# Altium PCB Rackmount_DSP.PcbDoc (part 11 of 24)
Units mil, origin at the board's own origin, x right, y up, seen from the top; angles counter-clockwise.
Board outline 10629.92 x 8267.72 mil, 4 copper layers (Top Layer, Mid Layer 1, Mid Layer 2, Bottom Layer), stack 36.2 mil thick; 4500 components, 1565 nets, 9765 pads, 3289 vias.
Unrouted connection lines stored in the file: 1.
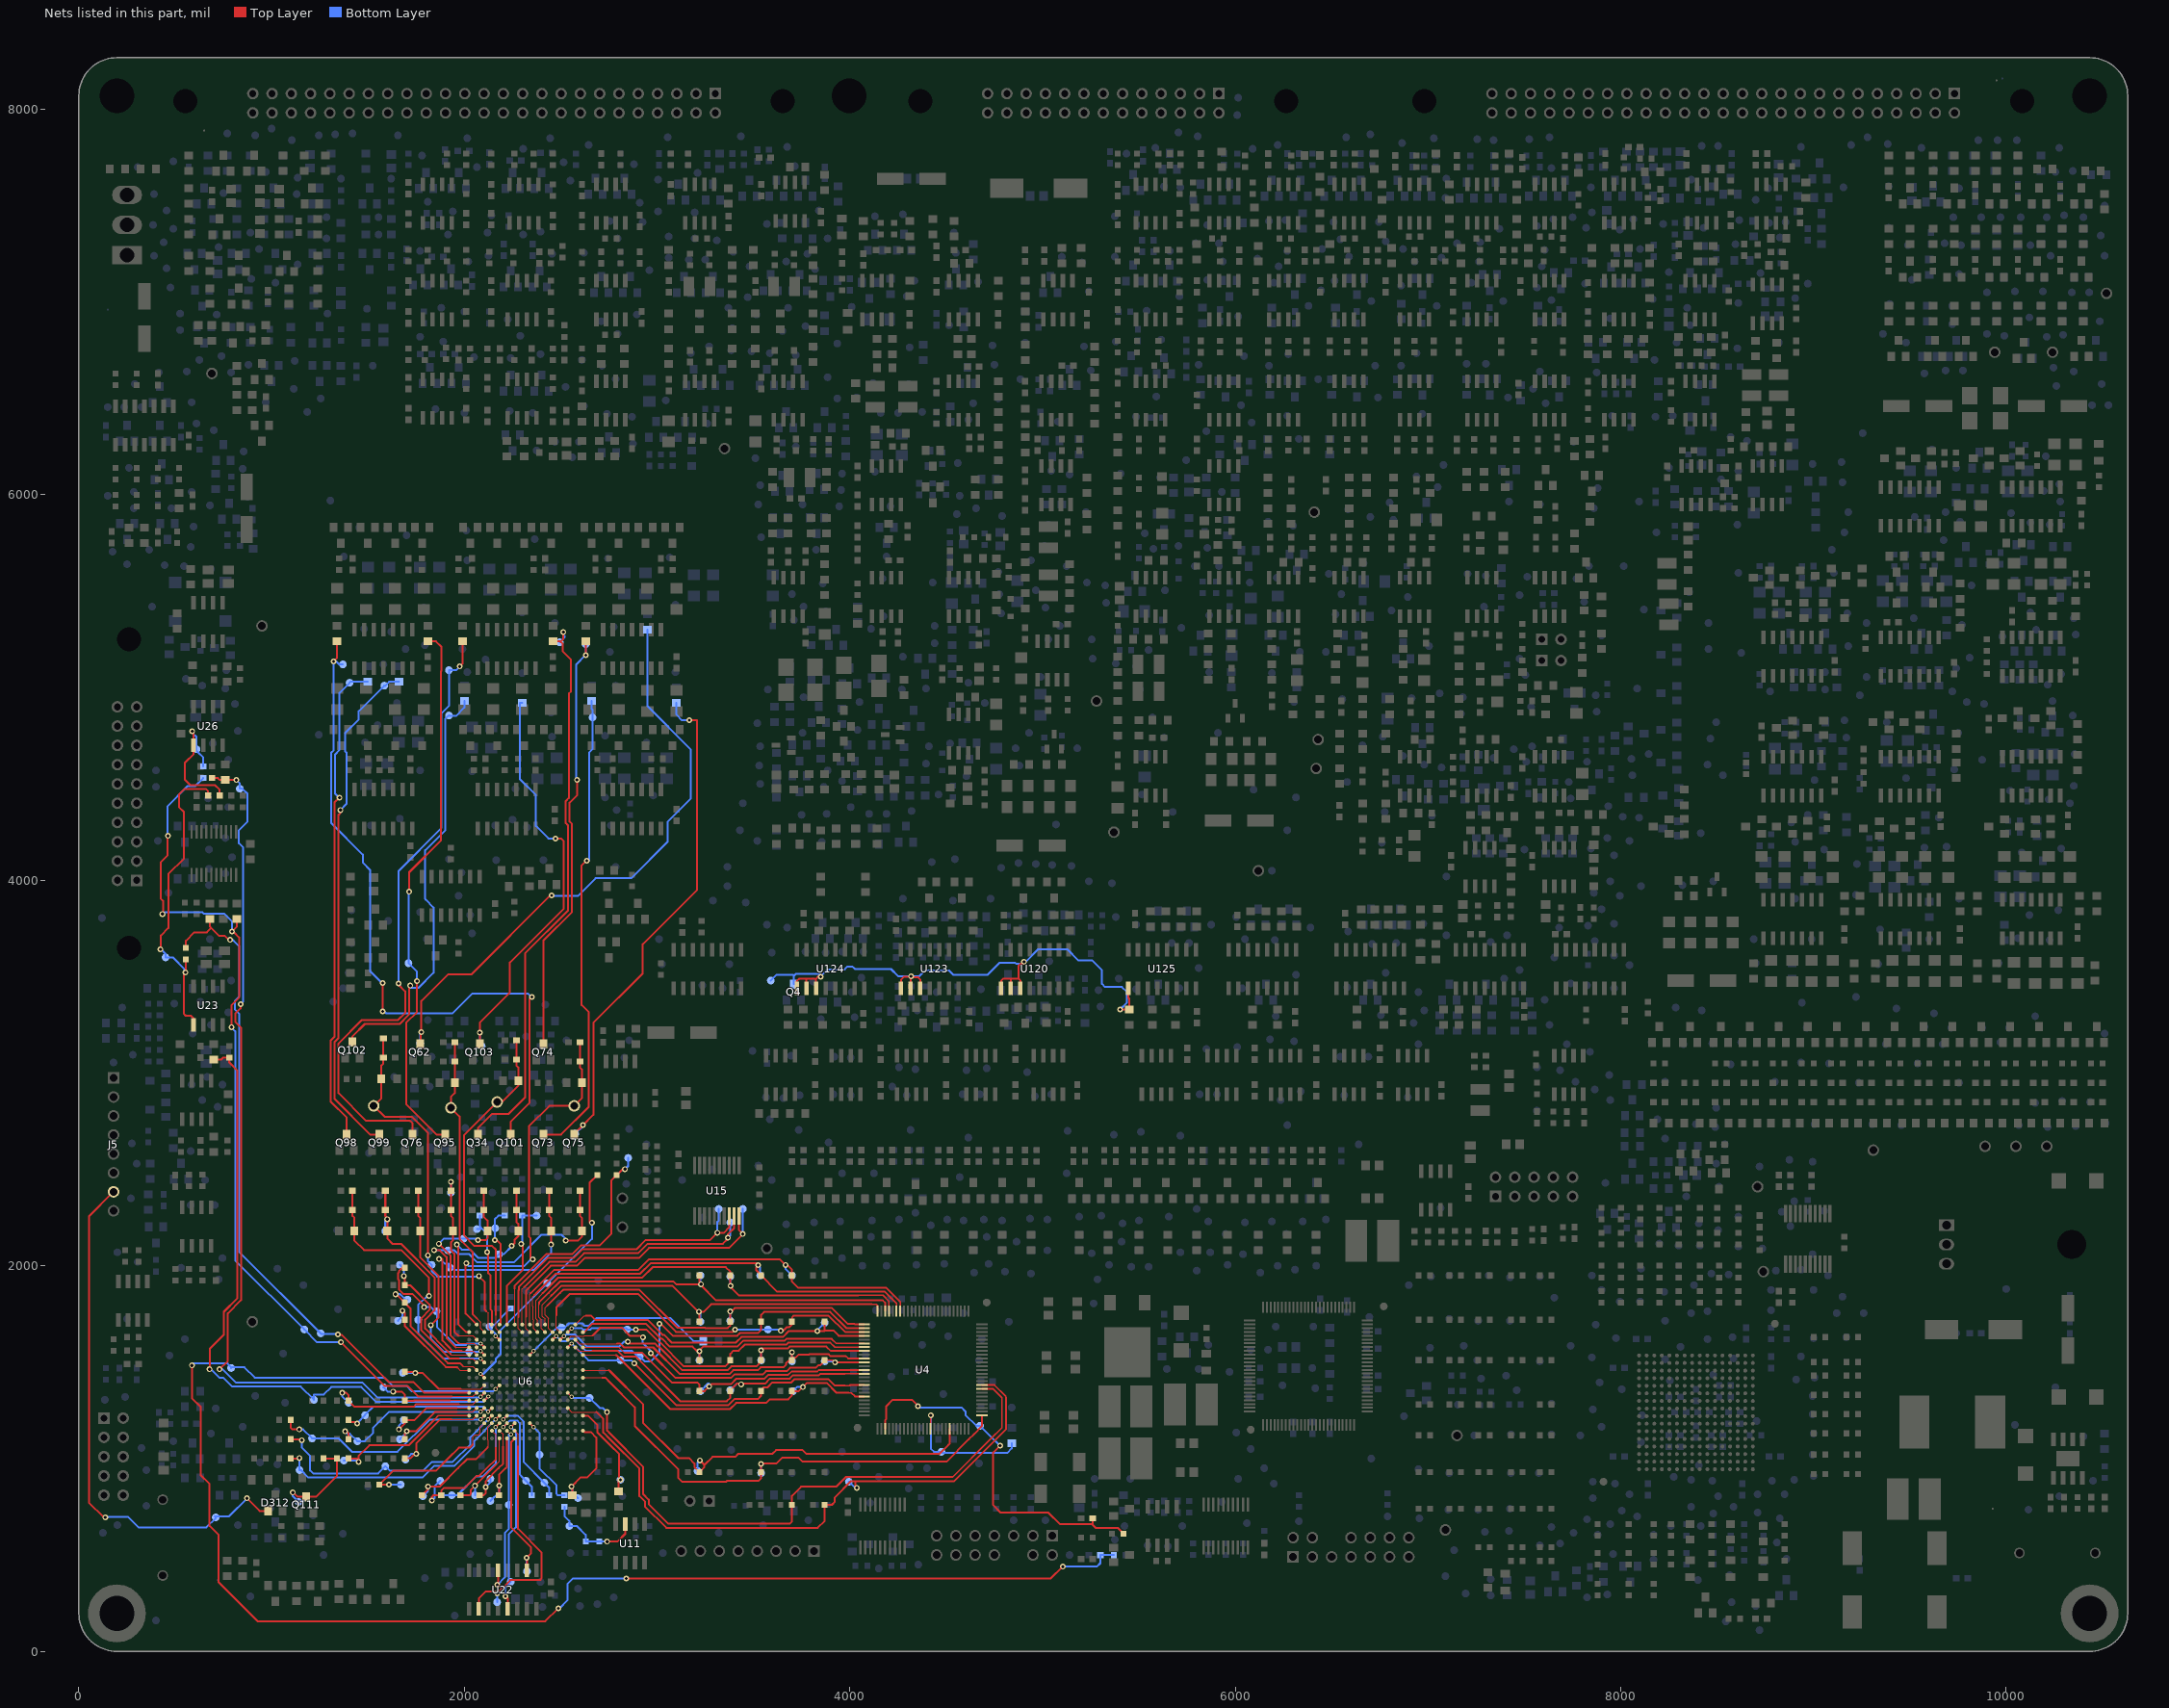
[diagram p13: the nets of this part, all layers, seen from the top]

## Via types
v1: diameter 30, hole 16, Top Layer to Bottom Layer, 3143 vias
v2: diameter 22, hole 12, Top Layer to Bottom Layer, 146 vias

## Nets (pads, with @x,y where several pads share a name; then routed paths per layer and width w, separated by ;. In a path a pad name is that pad's centre, name@x,y a point inside that pad or via, vN(x,y) a via of type N, cw(c..) or ccw(c..) an arc to the next point about the centre after c; other vN are vias at no path point) (continued)
INV_BOOT_EN: D312.1 J5.7 TP383.1 | length 2753.9
  Top Layer w10: v1(136.68,695.03) 136.68,696.48 128.01,696.48 52.18,772.3 52.18,2256.12 J5.7@180,2383.94 ; v1(872.31,793.94) 937.75,728.5 D312.1@982.5,728.5
  Bottom Layer w10: v1(136.68,695.03) 136.68,697.19 255.32,697.19 309.45,643.06 661.43,643.06 710,691.62 TP383.1@710,695 705,700 778.37,700 v1(872.31,793.94)
INV_BOOT_EN_I: Q111.3 R694.2 R1046.2 TP563.1 | length 505
  Top Layer w10: v1(1110.05,824) 1113.98,824 1136.48,801.5 Q111.3@1180,801.5 1230.39,801.5 1340,911.11 R1046.2@1340,1000 R694.2@1270,1000
  Bottom Layer w10: v1(1110.05,824) 1110.05,804.95 TP563.1@1140,775
INV_CAN1_RXD: R1312.1 R2722.1 TP382.1 U6.P11 | length 3403.3
  Top Layer w10: v1(677.95,1463.05) 679.64,1464.74 679.64,1569.94 752.06,1642.36 752.06,1761.39 821.55,1830.88 821.55,3013.72 780,3055.27 R2722.1@780,3080 747.5,3080 737.5,3070 R1312.1@700,3070 ; U6.P11@2103.46,1301.57 v2(2123.67,1321.78)
  Bottom Layer w10: v1(677.95,1463.05) 685.48,1463.05 728.98,1419.55 749.21,1419.55 794.77,1373.99 1151.01,1373.99 TP382.1@1220,1305 1220,1332.25 1270.8,1332.25 1309.63,1371.08 1465.18,1371.08 1541,1295.26 2097.15,1295.26 v2(2123.67,1321.78)
INV_CAN1_TXD: R1313.1 R3011.1 TP1783.1 U6.T10 | length 3533.7
  Top Layer w10: R3011.1@555,3650 555,3686.68 598.6,3730.28 664.45,3730.28 686.85,3752.68 ; R1313.1@680,3800 680,3759.52 686.85,3752.68 ; v1(784.31,3690.93) 777.32,3690.93 755.57,3712.68 726.84,3712.68 686.85,3752.68 ; v1(1344.62,1643.44) 1344.62,1642.81 1362.91,1642.81 1607.88,1397.84 1734.74,1397.84 1790.38,1342.2 1915,1342.2 1941.92,1342.2 1943.18,1340.94 U6.T10@2024.72,1340.94
  Bottom Layer w10: v1(784.31,3690.93) 784.31,3689.31 801.49,3689.31 831.77,3659.04 831.77,3396.39 808.63,3373.25 808.63,3331.26 831.84,3308.04 831.84,2072.27 TP1783.1@1255,1649.11 ; TP1783.1@1255,1650 TP1783.1@1255,1649.11 ; v1(1344.62,1643.44) 1342,1646.05 1258.06,1646.05 TP1783.1@1255,1649.11
INV_CAN1_TXD_5V: R2709.2 R3011.2 TP1875.1 U23.1 | length 1638
  Top Layer w10: v1(423.26,3642.44) 426.14,3642.44 426.14,3714.3 464.18,3752.35 464.18,4031.92 545.13,4112.87 545.13,4353.96 520.96,4378.13 520.96,4446.61 548.54,4474.19 657.96,4474.19 670,4462.15 R2709.2@670,4440 ; v1(553.47,3522.51) v1@555,3522.51 ; R3011.2@555,3590 v1@555,3522.51 ; U23.1@595,3250 595,3284.41 582.01,3297.4 554.87,3297.4 543.6,3308.67 543.6,3510.54 555.11,3522.05 555.11,3522.51 v1@555,3522.51
  Bottom Layer w10: v1(423.26,3642.44) 425.37,3642.44 450,3617.81 TP1875.1@450,3600 450,3599.56 488.14,3599.56 548.32,3539.38 548.32,3522.51 v1(553.47,3522.51)
INV_CAN2_RXD: R1307.1 R2723.1 TP1874.1 U6.P10 | length 4770.2
  Top Layer w10: R2723.1@690,4530 721,4530 731,4520 R1307.1@760,4520 v1(816.49,4520) ; v1(729.22,1463.05) 772.6,1506.43 772.6,1753.64 841.55,1822.59 841.55,3235.63 811.05,3266.13 811.05,3308.07 838.96,3335.98 v1(838.96,3357.05) ; v2(2083.78,1321.26) U6.P10@2103.46,1340.94
  Bottom Layer w10: v1(729.22,1463.05) 745.5,1463.05 813.55,1395 1470.84,1395 1548,1317.84 2083.78,1317.84 v2(2083.78,1321.26) ; v1(816.49,4520) 835,4501.49 TP1874.1@835,4475 848.98,4475 875.15,4448.83 875.15,4304.53 830.21,4259.59 830.21,4192.69 852.43,4170.47 852.43,3370.52 v1(838.96,3357.05)
INV_CAN2_TXD: R2714.1 R3013.1 TP1784.1 U6.R10 | length 4661.3
  Top Layer w6: 1933.9,1321.94 2045.09,1321.94 U6.R10@2064.09,1340.94
  Top Layer w10: v1(433.67,3825.26) 433.8,3825.26 436.47,3825.26 436.47,3893.62 423.88,3906.21 423.88,4093.54 459.02,4128.68 459.02,4232.71 462.72,4232.71 v1(462.72,4230.66) ; v1(791.4,3238.57) 790.91,3238.57 790.91,3351.5 831.26,3391.84 831.26,3703.73 805.54,3729.45 798.71,3729.45 v1(793.86,3734.3) 820,3760.44 R2714.1@820,3800 ; v1(1359.86,1603.44) 1585.46,1377.84 1704.11,1377.84 1759.74,1322.2 1915,1322.2 1933.64,1322.2 1933.9,1321.94
  Bottom Layer w10: v1(433.67,3825.26) 433.8,3825.26 433.8,3833.4 641.71,3833.4 648.56,3826.55 755.18,3826.55 793.86,3787.87 v1(793.86,3734.3) ; v1(462.72,4230.66) 462.72,4232.71 459.02,4232.71 459.02,4383.17 564.57,4488.71 603.71,4488.71 R3013.1@645,4530 ; v1(791.4,3238.57) 791.4,3237.01 811.59,3216.82 811.59,2027.42 TP1784.1@1169.5,1669.5 ; TP1784.1@1170,1670 TP1784.1@1169.5,1669.5 ; v1(1359.86,1603.44) 1235.57,1603.44 TP1784.1@1169.5,1669.5
INV_CAN2_TXD_5V: R2711.2 R3013.2 TP1886.1 U26.1 | length 710.2
  Top Layer w10: v1(588.32,4773.25) 595,4766.58 U26.1@595,4700 595,4655.75 550.47,4611.22 550.47,4521.01 577.28,4494.19 704.79,4494.19 730,4468.98 R2711.2@730,4440
  Bottom Layer w10: v1(588.32,4773.25) 588.32,4765.17 610,4743.49 TP1886.1@610,4680 610,4672.89 617.34,4665.55 645,4637.89 R3013.2@645,4590
INV_CPLD_CLK: R621.2 TP378.1 U6.H5 | length 1039.7
  Top Layer w10: U6.H5@2339.68,1537.8 v2(2359.37,1557.48)
  Bottom Layer w10: v2(2359.37,1557.48) 2481.89,1680 TP378.1@2505,1680 2521.27,1680 2542.86,1701.59 2611.56,1701.59 2624.19,1688.96 2645.73,1688.96 2686.25,1729.48 3068.39,1729.48 3187.88,1610 R621.2@3240,1610
INV_CPLD_RESET: C514.1 R1048.2 TP377.1 U6.M9 | length 7806.9
  Top Layer w6: v2(2161.93,1360.04) U6.M9@2182.2,1380.32
  Top Layer w10: v1(586.1,1483.26) 586.1,1313.77 632.25,1267.62 632.25,913.76 677.53,868.48 677.53,651.25 724.88,603.91 724.88,357.79 926.83,155.85 2419.21,155.85 2486.16,222.79 v1(2488.46,222.79) ; v1(2840.58,378.59) 5042.8,378.59 5103.74,439.52 v1(5105.72,439.52)
  Bottom Layer w10: v1(586.1,1483.26) 586.1,1485.69 593.46,1493.05 770.91,1493.05 TP377.1@790,1473.96 ; TP377.1@790,1470 TP377.1@790,1473.96 ; v2(2161.93,1360.04) 2150.28,1348.39 1728.27,1348.39 1698.82,1377.84 1626.75,1377.84 1584.59,1420 912.71,1420 858.75,1473.96 TP377.1@790,1473.96 ; v1(2488.46,222.79) 2492.86,222.79 2535.13,265.07 2535.13,349.15 2564.56,378.59 v1(2840.58,378.59) ; v1(5105.72,439.52) 5281.62,439.52 5300,457.9 C514.1@5300,500 R1048.2@5370,500
INV_CS: Q4.3 R1464.2 TP376.1 U120.9 U120.10 U120.11 U123.9 U123.10 U123.11 U124.9 U124.10 U124.11 U125.9 | length 3330.1
  Top Layer w10: U124.9@3725,3440 3725,3477.79 3736.96,3489.75 3775,3489.75 3775,3489.48 ; U124.10@3775,3440 3775,3489.48 ; U124.11@3825,3440 3825,3489.48 ; v1(3848.72,3499.92) 3835.44,3499.92 3825,3489.48 ; U123.9@4265,3440 4265,3484.15 4281.64,3500.78 v1@4315,3500.78 ; U123.10@4315,3440 v1@4315,3495.97 ; v1(4317.42,3502.7) 4317.42,3500.78 v1@4315,3500.78 ; U123.11@4365,3440 4365,3485.79 4354.82,3495.97 v1@4315,3495.97 ; U120.9@4785,3440 4785,3478.71 4796.29,3490 4835,3490 ; U120.10@4835,3440 4835,3490 ; U120.11@4885,3440 4885,3480.3 4875.3,3490 ; v1(4903.74,3576.79) 4899.51,3576.79 4899.51,3567.37 4887,3567.37 4875.29,3555.66 4875.29,3490 ; v1(5402.38,3330) R1464.2@5450,3330 5450,3385 5445,3390 U125.9@5445,3440 ; 3775,3489.48 3825,3489.48 ; v1@4315,3495.97 v1@4315,3500.78 ; 4835,3490 4875.29,3490
  Bottom Layer w10: TP376.1@3590,3480 3620.41,3510.41 3704.16,3510.41 3709.74,3504.84 ; Q4.3@3710,3461.5 3710,3504.58 3709.74,3504.84 ; v1(5402.38,3330) 5437.5,3365.13 5437.5,3421.33 5411.85,3446.99 5324.72,3446.99 5308.52,3463.18 5308.52,3533.06 5255.86,3585.73 5184.57,3585.73 5128.23,3642.07 4977.52,3642.07 4912.24,3576.79 v1(4903.74,3576.79) 4899.51,3576.79 4899.51,3566.72 4863.93,3566.72 4857.3,3573.35 4777.99,3573.35 4714.48,3509.84 4537.04,3509.84 4515.7,3531.18 4389.32,3531.18 4360.84,3502.7 v1(4317.42,3502.7) 4250.35,3502.7 4213.46,3539.6 4026.43,3539.6 4013.23,3552.8 3988.37,3552.8 3973.15,3537.57 3886.37,3537.57 v1(3848.72,3499.92) 3845.21,3503.43 3845.21,3511.57 3842.59,3514.19 3719.09,3514.19 3709.74,3504.84
INV_DA_CLK: TP564.1 U6.H2 U15.10 | length 1702.2
  Top Layer w6: 2320.32,1736.03 2320.32,1675.28 U6.H2@2339.68,1655.91
  Top Layer w10: 2320.32,1736.03 2320.32,1853.57 2319.68,1854.2 2319.68,1860 2319.68,1870.77 2449.04,2000.13 2584.06,2000.13 2624.06,2040.13 2905.76,2040.13 2958.54,2092.9 3373.33,2092.9 3445,2164.57 v1(3445,2165.27) 3425.16,2185.11 U15.10@3425.16,2258.7
  Bottom Layer w10: v1(3445,2165.27) TP564.1@3445,2295
INV_DA_CS: TP565.1 U6.J2 U15.8 | length 1649.2
  Top Layer w6: 2279.72,1734.85 2279.94,1734.85 2279.94,1676.28 U6.J2@2300.32,1655.91
  Top Layer w10: 2279.72,1734.85 2279.72,1860 2279.72,1871.99 2281.81,1874.08 2281.81,1889.46 2432.48,2040.13 2567.49,2040.13 2612.5,2085.14 2892.43,2085.14 2941.37,2134.08 3275.01,2134.08 v1(3313.01,2172.07) 3347.35,2172.07 3373.98,2198.7 U15.8@3373.98,2258.7
  Bottom Layer w10: v1(3313.01,2172.07) 3313.01,2227.54 3320,2234.53 TP565.1@3320,2295
INV_DA_Data: TP566.1 U6.J1 U15.9 | length 1575.2
  Top Layer w6: U6.J1@2300.32,1695.28 2300.32,1860 2300.32,1879.68 2311.45,1890.82
  Top Layer w10: 2311.45,1890.82 2440.76,2020.13 2575.77,2020.13 2620.78,2065.14 2902.16,2065.14 2951.09,2114.08 3341.05,2114.08 3368.12,2141.15 v1(3368.12,2146.1) 3367.92,2146.1 3367.92,2164.36 3399.57,2196.01 U15.9@3399.57,2258.7
  Bottom Layer w10: v1(3368.12,2146.1) 3380,2157.97 TP566.1@3380,2225
INV_DS_A: R1083.1 TP577.1 U6.A13 | length 495.2
  Top Layer w10: U6.A13@2615.28,1222.83 2640.37,1222.83 2690.54,1172.66 2690.54,1134.71 2755,1070.25 2802.85,1022.41 v1@2802.85,890 ; R1083.1@2800,830 2800,890 v1@2802.85,890 ; v1(2810,890) v1@2802.85,890
INV_DS_B: R1096.1 TP578.1 U6.A15 | length 534
  Top Layer w10: R1096.1@2560,810 2560,851.07 v1(2556.04,855.03) 2602.25,901.24 2636.63,901.24 2684.24,948.85 2684.24,950 2684.24,1109.33 2655.91,1137.66 2623.46,1137.66 2617.02,1144.09 U6.A15@2615.28,1144.09
  Bottom Layer w10: v1(2556.04,855.03) 2560,855.03 2560,825 TP578.1@2590,795
INV_DSP_CLK: R620.2 TP353.1 U4.90 | length 707.5
  Top Layer w9: U4.90@4419.37,1154.88 4419.37,1223.39 v1(4420,1224.02)
  Bottom Layer w10: v1(4420,1224.02) 4420,1051.55 4436.47,1035.08 4474.92,1035.08 TP353.1@4475,1035 4480.57,1029.43 4816,1029.43 4840,1053.44 R620.2@4840,1080
INV_DSP_GB1_U: C856.1 C857.1 R1981.1 TP38.1 TP352.1 U6.N2 | length 2013.5
  Top Layer w6: 2113.13,1764.88 2123.83,1754.17 2123.83,1674.91 U6.N2@2142.83,1655.91
  Top Layer w10: C856.1@1580,3180 C857.1@1580,3080 1580,3049 1570,3039 R1981.1@1570,2970 1570,2870 TP38.1@1530,2830 1530,2829.79 1586.32,2773.47 1726.42,2773.47 1811.62,2688.27 v1(1811.62,2054.69) ; v1(2076.06,1947.14) 2075.26,1947.14 2075.26,1945.47 2106.27,1914.46 2106.27,1860 2106.27,1771.74 2113.13,1764.88
  Bottom Layer w10: v1(1811.62,2054.69) 1811.62,2023.38 TP352.1@1830,2005 1830,1973.75 1858.78,1944.97 2075.26,1944.97 2075.26,1947.14 v1(2076.06,1947.14)
INV_DSP_GB1_Uz: Q102.3 R1121.1 TP1581.1 | length 2228.8
  Top Layer w10: Q102.3@1420,3161.5 1420,3191.12 1483.71,3254.83 1663.88,3254.83 1713.11,3304.06 1713.11,3453.62 v1(1719.38,3453.62)
  Bottom Layer w10: v1(1719.38,3453.62) 1719.38,3442.23 1762.15,3442.23 1840.79,3520.88 1840.79,3859.04 1799.58,3900.25 1799.58,3901.23 1796.86,3903.95 1796.86,4155.4 1901.81,4260.35 1901.81,4838.99 1915.31,4852.5 TP1581.1@1920,4852.5 ; TP1581.1@1920,4855 TP1581.1@1920,4852.5 ; R1121.1@2000,4930 2000,4896.03 1956.47,4852.5 TP1581.1@1920,4852.5
INV_DSP_GB1_V: C852.1 C853.1 R1977.1 TP567.1 U6.R3 | length 982.7
  Top Layer w6: 1968.22,1636.91 2043.72,1636.91 U6.R3@2064.09,1616.54
  Top Layer w10: v1(1930,2436.08) C852.1@1930,2390 C853.1@1930,2290 1930,2259 1940,2249 R1977.1@1940,2180 1940,2131.31 1931.12,2122.43 1931.12,2079.15 1947.19,2063.08 1947.19,1860 1947.19,1657.94 1968.22,1636.91
  Bottom Layer w10: TP567.1@1930,2380 v1(1930,2436.08)
INV_DSP_GB1_Vz: Q95.3 R1129.1 TP1582.1 | length 2838
  Top Layer w10: v1(1713.65,3940.61) 1713.65,4041.79 1879.61,4207.75 1879.61,5086.59 1881.11,5088.09 1881.11,5211.3 1852.4,5240 R1129.1@1810,5240 ; v1(1754.55,3477.06) 1754.55,3317.22 1697.5,3260.17 1697.5,2839.22 1855.22,2681.5 Q95.3@1900,2681.5
  Bottom Layer w10: v1(1713.65,3940.61) 1710,3940.61 TP1582.1@1710,3570 1754.55,3525.45 v1(1754.55,3477.06)
INV_DSP_GB1_W: C858.1 C859.1 R1971.1 TP349.1 U6.P6 | length 1453.2
  Top Layer w10: C858.1@1420,2390 C859.1@1420,2290 1420,2259 1430,2249 R1971.1@1430,2180 1430,2130.78 1479.03,2081.75 1672.02,2081.75 1817.19,1936.58 v1(1817.19,1843.71) ; v2(2083.78,1518.11) U6.P6@2103.46,1498.43
  Bottom Layer w10: v1(1817.19,1843.71) 1806.39,1843.71 1760,1797.32 TP349.1@1760,1720 1760,1651.08 1892.97,1518.11 v2(2083.78,1518.11)
INV_DSP_GB1_Wz: Q98.3 R1132.1 TP1583.1 | length 2537.9
  Top Layer w10: v1(1352.59,4428.15) 1350.48,4428.15 1326.48,4404.15 1326.48,3189.45 1306.57,3169.54 1306.57,2852.29 1390,2768.86 Q98.3@1390,2681.5
  Bottom Layer w10: v1(1352.59,4428.15) 1351.43,4428.15 1329,4450.58 1329,4653.29 1352.59,4676.87 1352.59,4972.59 TP1583.1@1405,5025 1405,5025.86 1409.14,5030 R1132.1@1500,5030
INV_DSP_GB2_U: C848.1 C849.1 R1982.1 TP39.1 TP568.1 U6.M2 | length 1780
  Top Layer w6: 2163.18,1743.51 2163.18,1674.93 U6.M2@2182.2,1655.91
  Top Layer w10: 2163.22,1743.51 2163.22,1860 2163.22,2084.5 2144.28,2103.44 2052.81,2103.44 1997.5,2158.75 1997.5,2677.5 TP39.1@2170,2850 2194.92,2850 2280,2935.08 R1982.1@2280,2960 2280,3029 2270,3039 C849.1@2270,3070 C848.1@2270,3170
INV_DSP_GB2_Uz: Q103.3 R1122.1 TP569.1 | length 2170.1
  Top Layer w10: Q103.3@2080,3151.5 v1(2080,3209.47) 2080,3261.91 2236.32,3418.23 2236.32,3574.29 2516.04,3854.02 2516.04,4203.31 2502.37,4216.97 v1(2472.32,4216.97)
  Bottom Layer w10: v1(2080,3209.47) 2080,3155.13 2092.56,3142.58 TP569.1@2090,3140 ; R1122.1@2300,4920 2287.98,4920 2287.98,4524.77 2370.79,4441.96 2370.79,4282.28 2436.1,4216.97 v1(2472.32,4216.97)
INV_DSP_GB2_V: C850.1 C851.1 R1972.1 TP347.1 U6.T2 | length 1143.7
  Top Layer w10: v1(1961.12,2110) 1967.19,2110 1967.19,1860 1967.19,1698.31 2009.59,1655.91 U6.T2@2024.72,1655.91 ; v1(2246.14,2104.04) 2247.92,2104.04 2259.88,2115.99 2259.88,2133.56 2280,2153.68 R1972.1@2280,2180 2280,2217.5 2270,2227.5 C851.1@2270,2290 C850.1@2270,2390
  Bottom Layer w10: v1(1961.12,2110) 1986.77,2084.34 2029.73,2084.34 2073.27,2040.8 2160.8,2040.8 TP347.1@2180,2060 2204.26,2060 2247.96,2103.71 2246.14,2105.52 v1(2246.14,2104.04)
INV_DSP_GB2_Vz: Q101.3 R1130.1 TP1584.1 | length 3690.3
  Top Layer w10: v1(1320.91,5135.56) 1340,5154.65 R1130.1@1340,5240 ; v1(1576.88,3319.25) v1(1576.88,3467.34) ; Q101.3@2240,2681.5 2240,2746.68 2337.5,2844.18 2337.5,3382.55 v1(2350.4,3395.46)
  Bottom Layer w10: v1(1320.91,5135.56) v1@1322.62,5135.56 ; TP1584.1@1370,5120 1351.62,5120 1336.06,5135.56 v1@1322.62,5135.56 ; v1(1576.88,3319.25) 1585.76,3319.25 1593.99,3311.02 1939.5,3311.02 2041.86,3413.38 2328.16,3413.38 2346.08,3395.46 v1(2350.4,3395.46) ; v1(1576.88,3467.34) 1571.69,3467.34 1511.36,3527.67 1511.36,4053.53 1472.84,4092.06 1472.84,4133.07 1309,4296.91 1309,4661.57 1322.62,4675.19 v1@1322.62,5135.56
INV_DSP_GB2_W: C854.1 C855.1 R1970.1 TP570.1 U6.T5 | length 1219.8
  Top Layer w6: 1928.88,1541.95 1933.03,1537.8 U6.T5@2024.72,1537.8
  Top Layer w10: C854.1@1590,2390 C855.1@1590,2290 1590,2259 1600,2249 v1(1600,2241.89) R1970.1@1600,2180 1600,2142.03 1628.27,2113.76 1671.93,2113.76 1847.19,1938.5 1847.19,1771.37 1796.27,1720.45 1796.27,1674.55 1915,1555.82 1928.88,1541.95
  Bottom Layer w10: TP570.1@1590,2180 1590,2231.89 v1(1600,2241.89)
INV_DSP_GB2_Wz: Q99.3 R1192.1 TP1585.1 | length 2652.7
  Top Layer w10: v1(1357.24,4364.8) 1357.24,4349.61 1346.48,4338.85 1346.48,3181.11 1326.57,3161.2 1326.57,2865.57 1510.64,2681.5 Q99.3@1560,2681.5
  Bottom Layer w10: v1(1357.24,4364.8) 1389,4396.56 1389,4661.58 1381.29,4669.3 1381.29,4763.33 1452.28,4834.32 1452.28,4877.28 TP1585.1@1585,5010 1587.23,5007.77 1609.47,5030 R1192.1@1660,5030
INV_DSP_GH1_U: C451.1 C485.1 R942.1 TP36.1 TP572.1 U6.P2 | length 1584.3
  Top Layer w6: 2066.21,1725.43 2066.21,1725.37 2083.78,1707.8 2083.78,1675.59 U6.P2@2103.46,1655.91
  Top Layer w10: C451.1@1950,3160 C485.1@1950,3060 R942.1@1950,2950 1950,2895.52 1930,2875.52 TP36.1@1930,2820 1975,2775 1975,2138.79 2042.35,2071.44 2042.35,1860 2042.35,1749.14 2066.06,1725.43 2066.21,1725.43
INV_DSP_GH1_Uz: Q62.3 R1120.1 TP573.1 | length 3154
  Top Layer w10: Q62.3@1770,3151.5 1770,3155 1773.18,3158.18 1773.18,3213.17 v1(1777.25,3213.17) 1777.25,3373.99 1916.34,3513.09 2038.27,3513.09 2447.42,3922.23 v1(2452.56,3922.23)
  Bottom Layer w10: TP573.1@1770,3155 1770,3205.93 v1(1777.25,3213.17) ; v1(2452.56,3922.23) 2452.56,3920.25 2590.76,3920.25 2681.15,4010.64 2865.61,4010.64 3053.85,4198.88 3053.85,4302.92 3174.2,4423.27 3174.2,4679.7 2950,4903.9 R1120.1@2950,5300
INV_DSP_GH1_V: C453.1 C487.1 R944.1 TP345.1 U6.R5 | length 1630.5
  Top Layer w6: 1985.26,1558.96 1985.26,1557.77 2044.12,1557.77 U6.R5@2064.09,1537.8
  Top Layer w10: v1(1868.33,2035) 1887.19,2035 1887.19,1611.92 1915,1584.11 1940.15,1558.96 1985.26,1558.96 ; C453.1@2440,2390 C487.1@2440,2290 2440,2259 2450,2249 R944.1@2450,2180 2450,2142.5 2449.54,2142.04 v1(2449.54,2110.13)
  Bottom Layer w10: v1(1868.33,2035) 1874.56,2035 1898.96,2010.6 1918.47,2010.6 1918.47,1990 TP345.1@1925,1990 1936.95,1990 1947.6,1979.35 2362.46,1979.35 2449.54,2066.43 v1(2449.54,2110.13)
INV_DSP_GH1_Vz: Q73.3 R1128.1 TP1586.1 | length 2449.8
  Top Layer w10: Q73.3@2410,2681.5 2501.66,2681.5 2645.62,2825.45 2645.62,3315.84 2608.33,3353.13 2608.33,4077.41 2633.15,4102.22 v1(2634.79,4102.22)
  Bottom Layer w10: v1(2634.79,4102.22) 2648.59,4102.22 2648.59,4664.04 2665,4680.45 TP1586.1@2665,4845 2665,4885 2660,4890 R1128.1@2660,4930
INV_DSP_GH1_W: C455.1 C489.1 R946.1 TP344.1 U6.R4 | length 1196.4
  Top Layer w6: 1970.33,1597.96 1970.33,1596.91 2050.69,1596.91 2064.09,1583.51 U6.R4@2064.09,1577.17
  Top Layer w10: v1(1867.38,2114.6) 1927.19,2054.79 1927.19,1860 1927.19,1641.09 1970.33,1597.96 ; v1(2071.41,2133.45) 2070.82,2133.45 2072.02,2134.65 2112.15,2134.65 2120,2142.5 R946.1@2120,2180 2120,2235.06 2100,2255.06 C489.1@2100,2290 C455.1@2100,2390
  Bottom Layer w10: v1(1867.38,2114.6) 1892.78,2140 TP344.1@1995,2140 2068.66,2140 2068.66,2133.45 v1(2071.41,2133.45)
INV_DSP_GH1_Wz: Q34.3 R1191.1 TP575.1 | length 3001.5
  Top Layer w10: Q34.3@2070,2681.5 2070,2713.54 2144.93,2788.47 2230.65,2788.47 2315,2872.82 2315,3620.6 2537.79,3843.39 2537.79,4285.21 2526.39,4296.62 2526.39,4411.17 2542.5,4427.28 2542.5,4968.74 2553.86,4980.1 2553.86,5144.06 2511,5186.93 2511,5226.5 2497.5,5240 ; R1191.1@2460,5240 2497.5,5240 ; v1(2513.69,5287.67) 2513.69,5251.78 2501.91,5240 2497.5,5240
  Bottom Layer w10: TP575.1@2495,5235 2519.4,5259.4 2519.4,5266.87 2513.69,5272.58 v1(2513.69,5287.67)
INV_DSP_GH2_U: C452.1 C486.1 R943.1 TP37.1 TP343.1 U6.R1 | length 2056.7
  Top Layer w10: v1(2009.64,2013.56) 2006.95,2013.56 2006.95,1860 2006.95,1752.42 U6.R1@2064.09,1695.28 ; v1(2354.37,2034.08) 2341.86,2034.08 2341.86,2144.42 2335,2151.29 2335,2723.43 2441.57,2830 TP37.1@2570,2830 2610,2870 R943.1@2610,2950 2610,3019 2600,3029 C486.1@2600,3060 C452.1@2600,3160
  Bottom Layer w10: v1(2009.64,2013.56) 2009.64,2012.08 2021.93,1999.8 2311.12,1999.8 2341.86,2030.54 2341.86,2034.08 v1(2354.37,2034.08) v1@2354.37,2043.97
INV_DSP_GH2_Uz: Q74.3 R1123.1 TP1587.1 | length 2252.8
  Top Layer w10: Q74.3@2410,3151.5 2410,3687.1 2558.98,3836.08 2558.98,4292.31 2546.39,4304.9 2546.39,4402.89 2584.16,4440.66 v1(2584.16,4521.32) ; v1(2630,5168.29) R1123.1@2630,5240
  Bottom Layer w10: v1(2584.16,4521.32) 2579.86,4521.32 2579.86,5118.15 v1(2630,5168.29) TP1587.1@2630,5225
INV_DSP_GH2_V: C454.1 C488.1 R945.1 TP341.1 U6.T4 | length 1758.5
  Top Layer w6: 1956.6,1577.17 U6.T4@2024.72,1577.17
  Top Layer w10: v1(1842.41,2080.47) 1872.41,2080.47 1907.19,2045.69 1907.19,1625.37 1915,1617.56 1955.4,1577.17 1956.6,1577.17 ; v1(2526.12,2130.42) 2589.89,2130.42 2610,2150.53 R945.1@2610,2180 2610,2249 2600,2259 C488.1@2600,2290 C454.1@2600,2390
  Bottom Layer w10: v1(1842.41,2080.47) 1879.53,2080.47 1880,2080 TP341.1@1915,2080 1948.44,2080 1966.55,2061.89 2023.32,2061.89 2065.31,2019.91 2258.42,2019.91 2399.71,2161.2 2504.81,2161.2 2526.12,2139.9 v1(2526.12,2130.42)
INV_DSP_GH2_Vz: Q75.3 R1131.1 TP576.1 | length 2656.1
  Top Layer w10: Q75.3@2570,2681.5 2570,2685 v1(2615.55,2730.55) 2668.92,2783.92 2668.92,3260.86 2925.16,3517.09 2925.16,3668.34 3208.14,3951.32 3208.14,4830.22 v1(3167.5,4830.22)
  Bottom Layer w10: TP576.1@2575,2685 2615.55,2725.55 v1(2615.55,2730.55) ; R1131.1@3100,4920 3100,4859.58 3129.36,4830.22 v1(3167.5,4830.22)
INV_DSP_GH2_W: C456.1 C490.1 R947.1 TP366.1 U6.P5 | length 1144.2
  Top Layer w10: C456.1@1760,2390 C490.1@1760,2290 1760,2259 1770,2249 R947.1@1770,2180 1770,2044.07 1867.19,1946.88 1867.19,1733.52 v1(1826.27,1692.6) ; v2(2083.78,1557.48) U6.P5@2103.46,1537.8
  Bottom Layer w10: v1(1826.27,1692.6) 1826.27,1620.73 1892,1555 TP366.1@2025,1555 2081.3,1555 v2(2083.78,1557.48)
INV_DSP_GH2_Wz: Q76.3 R1133.1 TP1588.1 | length 3275
  Top Layer w10: v1(1659.2,3464.36) 1659.2,3457.23 1692.72,3423.71 1692.72,3311.96 1655.59,3274.83 1468.62,3274.83 1347.5,3153.71 1347.5,2895.57 1490.57,2752.5 1718.5,2752.5 1730,2741 Q76.3@1730,2681.5 ; v1(1975.85,5109.74) 1990,5123.9 R1133.1@1990,5240
  Bottom Layer w10: v1(1659.2,3464.36) 1659.2,4049.03 1881.81,4271.64 1881.81,4866.85 1920,4905.04 TP1588.1@1920,5090 1956.1,5090 v1(1975.85,5109.74)
INV_DSP_RESET: C508.1 R1052.2 TP364.1 U4.78 | length 1930.5
  Top Layer w9: U4.78@4183.15,1154.88 4183.15,1198.88 4188.65,1204.38 4188.65,1249.38
  Top Layer w10: 4188.65,1249.38 4188.65,1270.61 4223.08,1305.04 4321.21,1305.04 v1(4353.84,1272.4) ; v1(4779.33,1067) 4743.79,1031.46 4743.79,759.03 4782.81,720.01 5029.67,720.01 5090.69,659 5260,659 ; C508.1@5260,690 5260,659 ; R1052.2@5420,610 5420,611 5390,641 5275.09,641 5260,656.09 5260,659
  Bottom Layer w10: v1(4353.84,1272.4) 4353.84,1265.46 4579.54,1265.46 4600.48,1244.52 4600.48,1225.87 4656.35,1170 TP364.1@4675,1170 4756.79,1088.21 4758.12,1088.21 v1(4779.33,1067)
INV_EEPROM_CTR: R750.2 R751.1 R1039.2 TP363.1 U11.7 | length 521.9
  Top Layer w10: v1(2741.09,569.05) 2743.02,570.98 2795.98,570.98 2835,610 U11.7@2835,660
  Bottom Layer w10: R1039.2@2520,750 2520,701.69 2545,676.69 TP363.1@2545,650 2584.93,650 2630,604.93 R751.1@2630,570 R750.2@2700,570 2741.09,570 v1(2741.09,569.05)
INV_ET0_IN: TP362.1 U6.K14 U22.13 | length 1023.8
  Top Layer w10: v1(2213.35,285.91) 2225,274.26 U22.13@2225,220 ; v2(2241.26,1163.78) U6.K14@2260.94,1183.46
  Bottom Layer w10: v1(2213.35,285.91) 2213.35,333.35 TP362.1@2240,360 2230,360 2230,606 2267.35,643.35 2267.35,1137.69 v2(2241.26,1163.78)
INV_ET0_OUT: TP579.1 U6.K16 U22.2 | length 814.9
  Top Layer w10: U6.K16@2260.94,1104.72 2243.27,1087.05 2243.27,950 2243.27,642.44 2344.5,541.21 2344.5,506.9 v1(2323.28,485.69) 2325,483.97 U22.2@2325,420
  Bottom Layer w10: v1(2323.28,485.69) 2323.28,455.69 2325,453.97 TP579.1@2325,415
INV_ET1_IN: TP361.1 U6.L15 U22.5 | length 922.1
  Top Layer w5: U6.L15@2221.57,1144.09 2236.42,1129.25 2236.42,1128.25 2240.26,1124.41 v2(2241.35,1125.5)
  Top Layer w10: v1(2171.29,344.77) 2175,348.49 U22.5@2175,420
  Bottom Layer w10: v1(2171.29,344.77) 2210,383.49 2210,614.28 2230,634.28 TP361.1@2230,760 2230,1125.5 v2(2241.35,1125.5)
INV_ET1_OUT: TP580.1 U6.K15 U22.10 | length 1303
  Top Layer w6: U6.K15@2260.94,1144.09 2279.94,1125.09 2279.94,1065.84 2279.03,1064.92 2279.03,1064.5 2278.54,1064.5
  Top Layer w10: U22.10@2075,220 2075,273.38 2112.57,310.95 2160.11,310.95 v1(2170,301.06) 2238.87,369.93 2393.01,369.93 2401.5,378.42 2401.5,512.49 2278.54,635.45 2278.54,950 2278.54,1064.5
  Bottom Layer w10: TP580.1@2170,255 v1(2170,301.06)
INV_EXT_IO_0: R1039.1 TP360.1 U6.H14 | length 468.5
  Top Layer w10: U6.H14@2339.68,1183.46 v2(2359.37,1163.78)
  Bottom Layer w10: v2(2359.37,1163.78) 2390,1133.15 TP360.1@2390,1020 2390,949.5 2478.12,861.37 2478.12,817.07 2485.19,810 R1039.1@2520,810
INV_EXT_IO_1: R1038.1 TP359.1 U6.M14 | length 568.3
  Top Layer w10: v2(2162.52,1163.78) U6.M14@2182.2,1183.46
  Bottom Layer w10: R1038.1@1880,810 TP359.1@1935,810 1963.45,810 2061.76,908.31 2097.22,908.31 2162.52,973.62 v2(2162.52,1163.78)
INV_EXT_IO_2: R1068.1 TP581.1 U6.R6 | length 795.6
  Top Layer w6: 1969.77,1518.96 1969.77,1518.8 2043.72,1518.8 U6.R6@2064.09,1498.43
  Top Layer w10: v1(1686.86,1947.09) 1690,1943.95 R1068.1@1690,1900 1718.47,1900 1820.58,1797.89 1820.58,1773.04 1776.27,1728.74 1776.27,1666.27 1915,1527.54 1923.58,1518.96 1969.77,1518.96
  Bottom Layer w10: TP581.1@1665,2005 1686.86,1983.14 v1(1686.86,1947.09)
INV_EXT_IO_3: R1069.1 TP582.1 U6.T7 | length 575.6
  Top Layer w6: 1963.91,1472.23 1977.08,1459.06 U6.T7@2024.72,1459.06
  Top Layer w10: v1(1678.68,1767.59) 1690,1756.27 R1069.1@1690,1720 1690,1689 1904.18,1474.82 1915,1474.82 1961.32,1474.82 1963.91,1472.23
  Bottom Layer w10: TP582.1@1655,1715 1678.68,1738.68 v1(1678.68,1767.59)
INV_EXT_IO_4: R1070.1 TP583.1 U6.T12 | length 480.8
  Top Layer w6: 1959.95,1262.2 U6.T12@2024.72,1262.2
  Top Layer w10: v1(1660.28,1151.12) 1660.28,1151.17 1690,1180.89 R1070.1@1690,1200 1742.31,1200 1804.52,1262.2 1915,1262.2 1959.95,1262.2
  Bottom Layer w10: v1(1660.28,1151.12) 1660.28,1170.18 1685,1194.9 TP583.1@1685,1200
INV_EXT_IO_5: R1016.1 TP584.1 U6.N14 | length 649.1
  Top Layer w6: 2121.69,1058.44 2124.44,1061.19 2124.44,1094.95 2122.46,1096.92 2122.46,1163.09 U6.N14@2142.83,1183.46
  Top Layer w10: R1016.1@1780,810 1781,810 1812.08,841.08 v1(1812.08,854.81) 1872.16,854.81 1967.35,950 2013.44,996.09 2059.34,996.09 2121.69,1058.44
  Bottom Layer w10: TP584.1@1785,805 1812.08,832.08 v1(1812.08,854.81)
INV_EXT_IO_6: R1037.1 TP358.1 U6.P4 | length 761.8
  Top Layer w10: R1037.1@1690,1990 1677.69,1990 1660,1972.31 1660,1965.22 1656.27,1961.5 1656.27,1930.6 1660,1926.87 1660,1877.79 1682.79,1855 1730.47,1855 1790.58,1794.9 v1(1790.58,1785.47) ; v2(2083.78,1596.85) U6.P4@2103.46,1577.17
  Bottom Layer w10: v1(1790.58,1785.47) 1826.55,1785.47 1847.02,1765 TP358.1@1855,1765 1857.74,1765 1857.74,1683.66 1951.4,1590 2007.19,1590 2014.04,1596.85 v2(2083.78,1596.85)
INV_EXT_IO_7: R1036.1 TP357.1 U6.M13 | length 1308.8
  Top Layer w10: R1036.1@1100,1000 1140.69,1000 v1(1143.8,1003.11) ; v2(2162.52,1203.15) U6.M13@2182.2,1222.83
  Bottom Layer w10: v1(1143.8,1003.11) 1145,1001.92 TP357.1@1145,940 1151.56,940 1188.64,902.92 1784.52,902.92 1842.74,961.15 1946.2,961.15 2051.04,1065.99 2051.04,1091.67 v2(2162.52,1203.15)
INV_EXT_IO_8: R1002.1 TP356.1 U6.L14 | length 533.3
  Top Layer w10: v2(2201.89,1163.78) U6.L14@2221.57,1183.46
  Bottom Layer w10: v2(2201.89,1163.78) 2235.91,1197.8 2273.93,1197.8 2287.35,1184.38 2287.35,918.38 2295.25,910.48 2295.25,909.75 TP356.1@2320,885 2350,855 R1002.1@2350,810
INV_EXT_IO_9: R1015.1 TP585.1 U6.M16 | length 454.9
  Top Layer w6: 2165.38,969.5 2182.2,986.33 U6.M16@2182.2,1104.72
  Top Layer w10: R1015.1@1980,810 2026.56,810 2033.79,817.23 2033.79,837.91 v1(2055,859.12) 2145.88,950 2165.38,969.5
  Bottom Layer w10: TP585.1@2055,810 v1(2055,859.12)
INV_EXT_IO_10: R1044.1 TP355.1 U6.P12 | length 884.1
  Top Layer w10: v1(1381.22,1141) 1390,1141 1400,1131 R1044.1@1400,1100 ; v2(2083.78,1242.52) U6.P12@2103.46,1262.2
  Bottom Layer w10: v1(1381.22,1141) 1393.13,1129.09 1405.91,1129.09 TP355.1@1445,1090 1483.46,1090 1527.35,1133.89 1527.35,1160.32 1609.55,1242.52 v2(2083.78,1242.52)
INV_EXT_IO_11: R1001.1 TP354.1 U6.L13 | length 590.8
  Top Layer w10: v2(2201.89,1203.15) U6.L13@2221.57,1222.83
  Bottom Layer w10: v2(2201.89,1203.15) 2220.27,1221.53 2279.02,1221.53 2307.35,1193.2 2307.35,982.65 TP354.1@2415,875 2440,850 R1001.1@2440,810
INV_EXT_IO_12: R1003.1 TP586.1 U6.M15 | length 456.5
  Top Layer w6: U6.M15@2182.2,1144.09 2201.34,1124.96 2201.34,1061.13
  Top Layer w10: R1003.1@2080,810 2100.43,810 2110.88,820.45 v1(2110.88,852.76) 2110.88,882.93 2177.95,950 2201.34,973.4 2201.34,1061.13
  Bottom Layer w10: v1(2110.88,852.76) 2135,876.88 TP586.1@2135,895
INV_EXT_IO_13: R1058.1 TP232.1 U6.N13 | length 1349.1
  Top Layer w10: R1058.1@1100,1100 1152.79,1100 v1(1157.15,1095.64) ; v2(2123.15,1203.15) U6.N13@2142.83,1222.83
  Bottom Layer w10: v1(1157.15,1095.64) 1155.93,1095.64 1155.93,1057.81 1200,1013.74 1200,938.53 1215.53,923 1553,923 TP232.1@1590,960 1590.86,960 1613.26,937.61 1787.35,937.61 1832.58,982.84 1939.61,982.84 2031.04,1074.27 2031.04,1111.04 v2(2123.15,1203.15)
INV_EXT_IO_14: R1057.1 TP587.1 U6.L16 | length 411.7
  Top Layer w10: R1057.1@2180,810 v1@2180,858.72 ; v1(2180.86,859.58) v1@2180,858.72 ; U6.L16@2221.57,1104.72 2221.57,956.94 2214.63,950 2180,915.37 v1@2180,858.72
  Bottom Layer w10: TP587.1@2135,780 2180.86,825.86 v1(2180.86,859.58)
INV_EXT_IO_15: R1043.1 TP588.1 U6.N15 | length 722.7
  Top Layer w6: U6.N15@2142.83,1144.09 2163.2,1123.72 2163.2,1056.44 2163.51,1056.44
  Top Layer w10: v1(1831.85,782.32) 1831.85,801.68 1840.16,810 R1043.1@1880,810 1880,834.15 1894.43,848.59 2002.04,848.59 2063.45,910 2076.9,910 2116.9,950 2163.51,996.61 2163.51,1056.44
  Bottom Layer w10: v1(1831.85,782.32) 1845.54,796.02 1845.54,855.54 TP588.1@1875,885
INV_EXT_IO_16: R1042.1 TP1746.1 U6.L1 | length 683
  Top Layer w10: U6.L1@2221.57,1695.28 2221.57,1860 2221.57,1897.11 2302.29,1977.83 2302.29,2105.16 2294.63,2105.16 v1(2294.63,2113.85)
  Bottom Layer w10: v1(2294.63,2113.85) 2300,2119.22 R1042.1@2300,2260 TP1746.1@2375,2260
INV_EXT_IO_17: R1041.1 TP1747.1 U6.N1 | length 621
  Top Layer w10: v1(2117.56,2070.8) 2123.71,2064.65 2123.71,1962.49 2136.41,1949.79 2136.41,1860 2136.41,1773.06 2142.83,1766.63 U6.N1@2142.83,1695.28
  Bottom Layer w10: TP1747.1@2065,2190 2085,2190 2085,2200.22 ; R1041.1@2080,2260 2080,2205.22 2085,2200.22 ; v1(2117.56,2070.8) 2117.56,2167.66 2085,2200.22
INV_EXT_IO_18: R1040.1 TP1748.1 U6.M1 | length 629.7
  Top Layer w10: v1(2157.7,2133.06) 2169.17,2133.06 2187.8,2114.42 2187.8,1860 2187.8,1700.87 U6.M1@2182.2,1695.28
  Bottom Layer w10: v1(2157.7,2133.06) TP1748.1@2157.7,2195 ; TP1748.1@2160,2195 TP1748.1@2157.7,2195 ; R1040.1@2210,2260 2176.79,2260 2157.7,2240.9 TP1748.1@2157.7,2195
INV_EXT_IO_19: R1064.1 TP592.1 U6.P8 | length 1336.9
  Top Layer w10: v2(2083.78,1439.37) U6.P8@2103.46,1419.68 ; v1(2661.64,2223.89) 2649.72,2223.89 2649.72,2430.72 2689,2470 R1064.1@2690,2470
  Bottom Layer w10: v2(2083.78,1439.37) 2098.38,1439.37 2163.15,1504.14 2163.15,1518.74 2188.62,1544.21 2188.62,1666.79 TP592.1@2430.92,1909.08 ; TP592.1@2430,1910 TP592.1@2430.92,1909.08 ; v1(2661.64,2223.89) 2661.64,2139.81 TP592.1@2430.92,1909.08
INV_EXT_IO_20: R1063.1 TP231.1 U6.P13 | length 1173.9
  Top Layer w10: R1063.1@1100,1200 1100,1158.61 1107.41,1151.2 v1(1143.17,1151.2) ; v2(2083.78,1203.15) U6.P13@2103.46,1222.83
  Bottom Layer w10: v1(1143.17,1151.2) 1163.8,1151.2 TP231.1@1210,1105 1346.51,1105 1416.51,1035 1653.44,1035 1821.59,1203.15 v2(2083.78,1203.15)
INV_EXT_IO_21: R1061.1 TP593.1 U6.R7 | length 713.4
  Top Layer w6: 1991.32,1480.99 1991.32,1479 2044.15,1479 U6.R7@2064.09,1459.06
  Top Layer w10: v1(1642.74,1852.62) 1648.38,1852.62 1690,1811 R1061.1@1690,1810 1690,1809 1720,1779 1720,1688.6 1913.78,1494.82 1915,1494.82 1977.49,1494.82 1991.32,1480.99
  Bottom Layer w10: v1(1642.74,1852.62) 1667.27,1852.62 1694.89,1825 TP593.1@1705,1825
INV_EXT_IO_22: R1062.1 TP594.1 U6.P9 | length 524
  Top Layer w6: 1980.48,1361.04 2084.19,1361.04 U6.P9@2103.46,1380.32
  Top Layer w10: R1062.1@1690,1450 1739.99,1450 v1(1744.99,1445) 1783.13,1445 1865.93,1362.2 1915,1362.2 1980.48,1362.2 1980.48,1361.04
  Bottom Layer w10: TP594.1@1680,1445 v1(1744.99,1445)
INV_EXT_IO_23: R1047.1 TP595.1 U6.T11 | length 494.4
  Top Layer w6: 1925.35,1302.2 2024.72,1302.2 U6.T11@2024.72,1301.57
  Top Layer w10: v1(1630.46,1347.84) 1674.79,1347.84 1690,1332.63 R1047.1@1690,1300 1738.91,1300 1741.12,1302.2 1915,1302.2 1925.35,1302.2
  Bottom Layer w10: TP595.1@1580,1370 1602.16,1347.84 v1(1630.46,1347.84)
INV_EXT_IO_24: R1065.1 TP596.1 U6.K1 | length 1252.8
  Top Layer w6: U6.K1@2260.94,1695.28 2260.94,1860 2260.94,1881.5
  Top Layer w10: 2260.94,1881.5 2260.94,1896.88 2424.19,2060.13 2559.2,2060.13 2604.21,2105.14 2702.28,2105.14 2763.39,2166.25 2763.39,2444.39 2789,2470 R1065.1@2790,2470 2791,2470 2822.47,2501.47 v1(2833.3,2501.47)
  Bottom Layer w10: v1(2833.3,2501.47) 2850,2518.17 TP596.1@2850,2560
INV_EXT_IO_25: R1066.1 TP230.1 U6.M3 | length 239.8
  Top Layer w10: v2(2162.52,1636.22) U6.M3@2182.2,1616.54
  Bottom Layer w10: v2(2162.52,1636.22) 2162.52,1646.53 2130,1679.05 TP230.1@2130,1685 2130,1685.62 2135.71,1691.33 2151.33,1691.33 R1066.1@2240,1780
INV_EXT_IO_26: R1046.1 TP597.1 U6.T13 | length 821.8
  Top Layer w8: 1846.7,1204.48 1865.12,1222.91 1915,1222.91 1984,1222.91 1984.07,1222.83 U6.T13@2024.72,1222.83
  Top Layer w10: R1046.1@1400,1000 1447.79,1000 v1@1451.16,996.63 ; v1(1451.16,983.42) v1@1451.16,996.63 ; 1846.7,1204.48 1711.21,1069 1506.74,1069 1451.16,1013.42 v1@1451.16,996.63
  Bottom Layer w10: TP597.1@1375,990 1444.58,990 v1(1451.16,983.42)
INV_EXT_IO_27: R1045.1 TP598.1 U6.P14 | length 826.1
  Top Layer w6: 2044.53,1073.84 2045.09,1073.84 2045.09,1112.59 2056.22,1123.72 2073.52,1123.72 2083.09,1133.3 2083.09,1163.09 U6.P14@2103.46,1183.46
  Top Layer w10: v1(1608.46,865) R1045.1@1560,865 1560,866 1632.54,938.54 1637.97,938.54 1853.74,938.54 1915,999.8 1971.73,1056.53 2027.22,1056.53 2044.53,1073.84
  Bottom Layer w10: v1(1608.46,865) TP598.1@1670,865
INV_EXT_IO_28: R1035.1 TP599.1 U6.R12 | length 517.1
  Top Layer w6: 1961.28,1242.19 2044.08,1242.19 U6.R12@2064.09,1262.2
  Top Layer w10: R1035.1@1690,1100 1690,1131.37 v1(1701.12,1142.49) 1749.93,1142.49 1849.64,1242.19 1915,1242.19 1961.28,1242.19
  Bottom Layer w10: TP599.1@1665,1100 1701.12,1136.12 v1(1701.12,1142.49)
INV_EXT_IO_29: R1034.1 TP229.1 U6.N12 | length 814.7
  Top Layer w10: R1034.1@1400,1200 1400,1189 1433,1189 1440.52,1181.48 v1(1443.83,1181.48) ; v2(2123.15,1242.52) U6.N12@2142.83,1262.2
  Bottom Layer w10: v1(1443.83,1181.48) 1443.83,1183.83 TP229.1@1485,1225 1485,1227.33 1526.19,1268.52 2097.15,1268.52 v2(2123.15,1242.52)
INV_EXT_IO_30: R1033.1 TP600.1 U6.R11 | length 825
  Top Layer w6: 1970.96,1281.2 2043.72,1281.2 U6.R11@2064.09,1301.57
  Top Layer w10: v1(1366.03,1341.08) 1387.02,1341.08 1400,1328.1 R1033.1@1400,1300 1400,1299 1430,1269 1736.29,1269 1749.49,1282.2 1915,1282.2 1970.96,1282.2 1970.96,1281.2
  Bottom Layer w10: v1(1366.03,1341.08) 1366.03,1323.97 TP600.1@1400,1290
INV_EXT_IO_31: R1032.1 TP601.1 U6.R13 | length 566.4
  Top Layer w6: 1929.91,1203.91 1929.91,1203.83 2045.09,1203.83 U6.R13@2064.09,1222.83
  Top Layer w10: R1032.1@1690,1000 1690,1001 1690.56,1001.56 1719.52,1001.56 1741.95,1023.99 v1(1749.99,1023.99) 1749.99,1079.11 1874.78,1203.91 1915,1203.91 1929.91,1203.91
  Bottom Layer w10: TP601.1@1695,995 1723.99,1023.99 v1(1749.99,1023.99)
INV_GPIO_0: R786.2 TP602.1 U4.47 U6.G1 | length 2254.9
  Top Layer w6: U6.G1@2379.06,1695.28 2379.06,1718.28 2371.68,1725.65 2371.68,1794.92 2370.89,1795.71 2370.89,1820.92 2406.59,1856.62 2406.59,1857.85
  Top Layer w9: 4043.94,1847.49 4171.64,1847.49 4202.83,1816.3 4202.83,1810 U4.47@4202.83,1765.12
  Top Layer w10: 2406.59,1857.85 2408.74,1860 2487.75,1939.01 2923.53,1939.01 2977.21,1992.68 3356.43,1992.68 3380,1969.11 R786.2@3380,1950 v1@3380,1896.08 ; 4043.94,1847.49 3423.46,1847.49 3380,1890.95 v1@3380,1894.97 ; v1@3380,1894.97 v1@3380,1896.08 ; v1@3380,1894.97 v1(3381.12,1896.08) v1@3380,1896.08
  Bottom Layer w10: TP602.1@3380,1945 3380,1897.2 v1(3381.12,1896.08)
INV_GPIO_1: R790.2 TP603.1 U4.44 U6.H1 | length 2400.1
  Top Layer w6: U6.H1@2339.68,1695.28 2338.89,1695.28 2338.89,1852.6 2344,1857.72
  Top Layer w9: 3762.51,1887.49 3762.51,1886.99 4187.3,1886.99 4261.89,1812.4 4261.89,1810 U4.44@4261.89,1765.12
  Top Layer w10: 2344,1857.72 2346.29,1860 2465.83,1979.54 2902.97,1979.54 2956.76,2033.33 3637.42,2033.33 v1(3666.05,2004.69) 3675.6,2004.69 3700,1980.29 R790.2@3700,1950 3700,1918.3 3730.8,1887.49 3762.51,1887.49
  Bottom Layer w10: v1(3666.05,2004.69) 3666.05,1983.95 TP603.1@3700,1950
INV_GPIO_2: R841.2 TP604.1 U4.45 U6.G2 | length 2373.5
  Top Layer w6: 2363.92,1848.4 2354.89,1839.37 2354.89,1789.08 2355.68,1788.29 2355.68,1719.02 2358.9,1715.8 2358.9,1676.06 U6.G2@2379.06,1655.91
  Top Layer w9: 4211.9,1834.81 4236.72,1810 4242.2,1804.51 U4.45@4242.2,1765.12
  Top Layer w10: 2363.92,1848.4 2375.52,1860 2474.79,1959.28 2912.43,1959.28 2966.2,2013.05 3525,2013.05 v1(3525,2003.33) 3514.39,1992.72 3514.39,1976.61 3540,1951 R841.2@3540,1950 3540,1949 3621.51,1867.49 4179.22,1867.49 4211.9,1834.81
  Bottom Layer w10: v1(3525,2003.33) 3535,1993.33 TP604.1@3535,1950
INV_GPIO_3: R792.2 TP605.1 U4.48 U6.F2 | length 2195.1
  Top Layer w6: 2388.89,1803.17 2388.89,1800.34 2387.68,1799.13 2387.68,1732.27 2399.25,1720.7 2399.25,1675.08 U6.F2@2418.43,1655.91
  Top Layer w9: 4043.94,1821 4171.27,1821 4182.27,1810 4183.15,1809.12 U4.48@4183.15,1765.12
  Top Layer w10: 2388.89,1803.17 2388.89,1811.65 2437.24,1860 2495.38,1918.14 3085.75,1918.14 3099.18,1904.72 v1(3227.97,1904.72) ; R792.2@3220,1950 3220,1912.68 v1(3227.97,1904.72) ; 4043.94,1821 3305.75,1821 3227.97,1898.78 v1(3227.97,1904.72)
  Bottom Layer w10: TP605.1@3225,1950 3225,1907.68 v1(3227.97,1904.72)
INV_GPIO_4: R788.2 TP606.1 U4.51 U6.E2 | length 2089.3
  Top Layer w6: 2430.18,1793.4 2419.68,1782.91 2419.68,1745.53 2437.43,1727.79 2437.43,1676.28 U6.E2@2457.8,1655.91
  Top Layer w9: 4024.96,1697.81 4024.96,1696.22 4040,1696.22 U4.51@4074.88,1696.22
  Top Layer w10: 2430.18,1793.4 2496.77,1860 2512.67,1875.89 2908.03,1875.89 3104.92,1679 3247.23,1679 3248.78,1677.45 3366.27,1677.45 3380,1691.19 R788.2@3380,1710 v1@3380,1757.85 ; v1(3380,1762.93) v1@3380,1757.85 ; 4024.96,1697.81 3989.56,1697.81 3906.87,1780.5 3402.65,1780.5 v1@3380,1757.85
  Bottom Layer w10: TP606.1@3380,1715 v1(3380,1762.93)
INV_GPIO_5: R784.2 TP240.1 U4.53 U6.D2 | length 1942
  Top Layer w6: 2476.89,1743.9 2476.89,1676.18 U6.D2@2497.17,1655.91
  Top Layer w9: R784.2@3700,1710 3700,1733.8 3707.2,1741 3890.51,1741 3974.66,1656.85 4040,1656.85 U4.53@4074.88,1656.85
  Top Layer w10: 2476.89,1743.9 2477.68,1744.7 2477.68,1783.9 2547.82,1854.03 2755,1854.03 2900.9,1854.03 3097.48,1657.45 3393.17,1657.45 3404.52,1668.81 v1(3404.69,1668.81) ; v1(3642.32,1663.18) 3654.18,1663.18 3672.67,1681.67 3686.27,1681.67 3700,1695.39 R784.2@3700,1710
  Bottom Layer w10: v1(3404.69,1668.81) 3538.81,1668.81 3540,1670 TP240.1@3575,1670 3635.5,1670 v1(3642.32,1663.18)
INV_GPIO_6: R780.2 TP607.1 U4.56 U6.A2 | length 1669.7
  Top Layer w9: 3795.36,1621.15 3905.66,1621.15 3929.02,1597.8 4040,1597.8 U4.56@4074.88,1597.8
  Top Layer w10: U6.A2@2615.28,1655.91 2620.89,1655.91 2664.42,1699.44 2755,1699.44 2942.01,1699.44 3019.66,1621.79 3025.34,1621.79 3065.78,1581.36 3184.37,1581.36 3209.12,1556.61 v1(3220,1556.61) ; R780.2@3220,1510 v1(3220,1556.61) ; 3795.36,1621.15 3671,1621.15 3661,1611.15 3446.03,1611.15 3415.75,1580.87 3238.76,1580.87 3220,1562.11 v1(3220,1556.61)
  Bottom Layer w10: TP607.1@3220,1510 v1(3220,1556.61)
INV_GPIO_7: R776.2 TP608.1 U4.58 U6.D3 | length 1841.8
  Top Layer w9: 3808.95,1581.15 3878.64,1581.15 3901.37,1558.43 4040,1558.43 U4.58@4074.88,1558.43
  Top Layer w10: U6.D3@2497.17,1616.54 v2(2516.85,1636.22) ; v1(2848.7,1606.73) 2848.7,1596.81 2988.08,1596.81 3003.09,1581.79 3007.71,1581.79 3130.5,1459 3365.17,1459 3385.17,1479 3514.66,1479 3540,1504.34 R776.2@3540,1510 v1(3540,1561.15) 3540,1569.93 3541.23,1571.15 3677.57,1571.15 3687.57,1581.15 3808.95,1581.15
  Bottom Layer w10: v2(2516.85,1636.22) 2521.65,1636.22 2528.28,1642.85 2575.27,1642.85 2637.5,1580.62 2802.49,1580.62 2828.59,1606.73 v1(2848.7,1606.73) ; TP608.1@3540,1510 v1(3540,1561.15)
INV_GPIO_8: R773.2 TP609.1 U4.60 U6.B3 | length 1711.2
  Top Layer w6: U6.B3@2575.91,1616.54 2596.17,1596.27 2755,1596.27 2793.16,1596.27
  Top Layer w9: 3924.18,1531 3979.78,1531 3991.73,1519.06 4040,1519.06 U4.60@4074.88,1519.06
  Top Layer w10: 2793.16,1596.27 2808.3,1596.27 2827.85,1576.72 2979.88,1576.72 3117.6,1439 3374.77,1439 3394.77,1459 3522.95,1459 3537.97,1474.02 3656.23,1474.02 3670,1487.79 3670,1495.68 3684.32,1510 R773.2@3700,1510 R773.2@3700,1521 ; v1(3700,1551.15) R773.2@3700,1521 ; 3924.18,1531 3901.21,1531 3891.21,1541 3788.79,1541 3787.79,1540 3735.36,1540 3716.36,1521 R773.2@3700,1521
  Bottom Layer w10: TP609.1@3700,1505 v1(3700,1551.15)
INV_GPIO_9: R770.2 TP610.1 U4.61 U6.C3 | length 1797.5
  Top Layer w6: U6.C3@2536.54,1616.54 2536.54,1617.62 2554.8,1635.89 2622.13,1635.89 2624.68,1638.44 2665.26,1638.44
  Top Layer w9: R770.2@3870,1510 3911.71,1510 v1(3922.82,1498.89) 3991.36,1498.89 3991.84,1499.37 4040,1499.37 U4.61@4074.88,1499.37
  Top Layer w10: 2665.26,1638.44 2704.98,1678.16 2755,1678.16 2818.16,1678.16 2859.57,1636.75 2911.87,1636.75 2919.18,1629.44 v1(2926.23,1629.44) ; v1(2967.45,1546.72) 3095.18,1419 3383.46,1419 3401.09,1436.63 3547.22,1436.63 3564.61,1454.02 3672.3,1454.02 3689.5,1471.21 3823.43,1471.21 3835.61,1483.39 3844.39,1483.39 3870,1509 R770.2@3870,1510
  Bottom Layer w10: v1(2926.23,1629.44) 2924.14,1629.44 2924.14,1601.77 2967.45,1558.46 v1(2967.45,1546.72) ; TP610.1@3870,1505 3916.71,1505 v1(3922.82,1498.89)
INV_GPIO_10: R767.2 TP611.1 U4.64 U6.B4 | length 1781.4
  Top Layer w6: U6.B4@2575.91,1577.17 2594.91,1558.17 2665.99,1558.17
  Top Layer w9: 3974.88,1440.32 4040,1440.32 U4.64@4074.88,1440.32
  Top Layer w10: 2665.99,1558.17 2755,1558.17 2795.5,1558.17 2823.86,1529.81 2888.98,1529.81 2995.68,1423.11 2995.68,1421.81 3119.71,1297.78 3361.55,1297.78 3380,1316.23 R767.2@3380,1350 3380,1354.87 3415.13,1390 3435.71,1390 v1(3435.71,1385.14) 3435.71,1384.28 3441.41,1389.99 3562.74,1389.99 3570.89,1398.14 3570.89,1399.98 3585.93,1415.02 3688.46,1415.02 3705.65,1432.21 3839.58,1432.21 3847.68,1440.32 3974.88,1440.32
  Bottom Layer w10: TP611.1@3380,1355 3415,1390 3435.71,1390 v1(3435.71,1385.14)
INV_GPIO_11: R777.2 TP612.1 U4.70 U6.A5 | length 1733.8
  Top Layer w6: U6.A5@2615.28,1537.8 2755,1537.8 2784.76,1537.8
  Top Layer w9: 3993.67,1341 4008.08,1341 4026.87,1322.2 4040,1322.2 U4.70@4074.88,1322.2
  Top Layer w10: 2784.76,1537.8 2787.58,1537.8 3068.33,1257.05 3378.06,1257.05 3410.09,1289.08 3565.87,1289.08 3584.83,1308.04 3680.53,1308.04 3700,1327.51 R777.2@3700,1350 3735.02,1350 v1(3756.02,1371) 3777.23,1392.21 3880,1392.21 3931.22,1341 3993.67,1341
  Bottom Layer w10: TP612.1@3705,1350 3726,1371 v1(3756.02,1371)
INV_GPIO_12: R781.2 TP613.1 U4.1 U6.A8 | length 2664.3
  Top Layer w6: U6.A8@2615.28,1419.68 2715.28,1419.68
  Top Layer w9: 4643.36,1126.31 4685.12,1168.07 U4.1@4685.12,1223.78
  Top Layer w10: 2715.28,1419.68 2731.67,1419.68 2755,1396.36 2884.73,1266.62 2884.73,1169.55 3108.5,945.78 3108.5,901 3130.5,879 3357.28,879 3364.31,886.03 3527,886.03 3540,899.03 R781.2@3540,930 v1@3540,962.13 ; v1(3539.38,971.61) 3540,971.61 v1@3540,962.13 ; 4643.36,1126.31 4617.05,1100 4501.17,984.12 3754.68,984.12 3733.33,1005.47 3650.04,1005.47 3618.7,974.13 3552,974.13 v1@3540,962.13
  Bottom Layer w10: v1(3539.38,971.61) 3540,971.61 TP613.1@3540,925
INV_GPIO_13: R785.2 TP614.1 U4.95 U6.A7 | length 2444.1
  Top Layer w6: U6.A7@2615.28,1459.06 2750.36,1459.06
  Top Layer w9: 4511.74,1071.08 4517.8,1077.13 4517.8,1100 U4.95@4517.8,1154.88
  Top Layer w10: 2750.36,1459.06 2755,1454.41 2928.46,1280.96 2928.46,1183.68 3109.62,1002.52 3166.19,1002.52 3194.39,974.31 3194.39,956.61 R785.2@3220,931 ; R785.2@3220,930 R785.2@3220,931 ; v1(3222.06,990.81) 3245.61,967.26 ; 4511.74,1071.08 4465.93,1025.26 3773.44,1025.26 3754.23,1044.47 3617.3,1044.47 3597.4,1024.58 3421.05,1024.58 3405.48,1009 3287.35,1009 3245.61,967.26 ; R785.2@3220,931 3245.61,956.61 3245.61,967.26
  Bottom Layer w10: TP614.1@3210,935 3210,978.75 v1(3222.06,990.81)
INV_GPIO_14: R789.2 TP239.1 U4.8 U6.C10 | length 3250.6
  Top Layer w6: U6.C10@2536.54,1340.94 2556.22,1321.26 v2(2557,1321.26)
  Top Layer w9: 4533.17,903.69 4729.48,1100 4730,1100.52 4789.12,1159.64 4789.12,1315.94 4743.49,1361.57 4730,1361.57 U4.8@4685.12,1361.57
  Top Layer w10: v1(2740.37,1240.85) 2740.37,1144.76 2755,1130.13 2928.5,956.63 2928.5,814.93 2956.59,786.84 2956.59,763.67 3058.35,661.91 3688.62,661.91 3700,673.29 R789.2@3700,760 3700,806.83 3747.12,853.95 3928.98,853.95 3978.73,903.69 4533.17,903.69
  Bottom Layer w10: v2(2557,1321.26) 2563.63,1314.63 2649.63,1314.63 TP239.1@2650,1315 2702.94,1262.06 2719.16,1262.06 v1(2740.37,1240.85)
INV_GPIO_15: R793.2 TP615.1 U4.9 U6.C12 | length 3357
  Top Layer w6: U6.C12@2536.54,1262.2 2557.26,1241.49 2567.69,1241.49 2568.04,1241.83 2583.78,1241.83 2584.12,1241.49 2607.06,1241.49 2607.41,1241.83 2623.15,1241.83 2623.5,1241.49 2685.44,1241.49
  Top Layer w9: U4.9@4685.12,1381.26 4730,1381.26 4750.67,1381.26 4809.62,1322.31 4809.62,1315.76
  Top Layer w10: 2685.44,1241.49 2720.37,1206.55 2720.37,1135.61 2755,1100.99 2908.5,947.49 2908.5,805.91 2936.51,777.89 2936.51,752.2 3048.44,640.27 3833.36,640.27 3870,676.9 R793.2@3870,760 3906.38,760 3922.3,775.92 3922.3,798.67 4006.37,882.74 4029.87,882.74 ; v1(4036.78,848.15) 4029.87,855.06 4029.87,882.74 ; 4809.62,1315.76 4809.62,1151.14 4541.21,882.74 4029.87,882.74
  Bottom Layer w10: TP615.1@3995,880 4026.85,848.15 v1(4036.78,848.15)
INV_GPIO_16: R842.2 TP616.1 U4.50 U6.F1 | length 2103.3
  Top Layer w6: U6.F1@2418.43,1695.28 2418.43,1724.16 2403.68,1738.9 2403.68,1798.16 2449.37,1843.84
  Top Layer w9: 4113,1800.5 4138.27,1800.5 4143.78,1794.99 U4.50@4143.78,1765.12
  Top Layer w10: 2449.37,1843.84 2465.52,1860 2503,1897.48 3077.94,1897.48 3212.94,1762.48 v1(3217.29,1762.48) ; R842.2@3220,1710 3220,1759.77 v1(3217.29,1762.48) ; 4113,1800.5 4040,1800.5 3280.29,1800.5 3242.27,1762.48 v1(3217.29,1762.48)
  Bottom Layer w10: v1(3217.29,1762.48) 3225,1754.77 TP616.1@3225,1710
INV_GPIO_17: R791.2 TP238.1 U4.52 U6.E3 | length 2014.6
  Top Layer w9: 4015.06,1676.54 4040,1676.54 U4.52@4074.88,1676.54
  Top Layer w10: U6.E3@2457.8,1616.54 v2(2477.48,1636.22) ; v1(3012.98,1699.48) 3019.49,1699.48 3081.52,1637.45 3415.76,1637.45 3429.46,1651.15 3522.58,1651.15 3540,1668.58 R791.2@3540,1710 3540,1745.63 3554.87,1760.5 3898.58,1760.5 3982.55,1676.54 4015.06,1676.54
  Bottom Layer w10: v2(2477.48,1636.22) 2503.48,1610.22 2530.22,1610.22 2542.85,1622.85 2566.99,1622.85 2629.72,1560.12 2867.89,1560.12 2898.01,1530 TP238.1@2910,1530 2934.75,1505.25 2968.4,1505.25 3012.98,1549.83 v1(3012.98,1699.48)
INV_GPIO_18: R787.2 TP617.1 U4.54 U6.B1 | length 1720.6
  Top Layer w6: U6.B1@2575.91,1695.28 2621.59,1740.96 2630.22,1740.96
  Top Layer w9: 3914.62,1664.38 3941.83,1637.17 4040,1637.17 U4.54@4074.88,1637.17
  Top Layer w10: 2630.22,1740.96 2658.25,1740.96 2679.76,1719.45 2755,1719.45 2950.59,1719.45 3028.24,1641.79 3035.8,1641.79 3075.93,1601.66 3408.25,1601.66 3437.75,1631.15 3652.72,1631.15 3683.16,1661.59 v1(3832.17,1661.59) 3870,1661.59 3870,1662.95 ; R787.2@3870,1710 3870,1662.95 ; 3914.62,1664.38 3914.62,1662.95 3870,1662.95
  Bottom Layer w10: v1(3832.17,1661.59) 3832.17,1667.17 TP617.1@3870,1705
INV_GPIO_19: R783.2 TP237.1 U4.57 U6.C2 | length 1717.9
  Top Layer w9: 3797.07,1601.15 3898.79,1601.15 3921.83,1578.11 4040,1578.11 U4.57@4074.88,1578.11
  Top Layer w10: U6.C2@2536.54,1655.91 v2(2556.22,1675.59) ; v1(2890.21,1669.38) 2943.79,1669.38 3011.38,1601.79 3015.99,1601.79 3138.79,1479 3352.88,1479 3380,1506.12 R783.2@3380,1510 3380,1543.79 3396.54,1560.32 3423.48,1560.32 3454.32,1591.15 3669.29,1591.15 3679.29,1601.15 3797.07,1601.15
  Bottom Layer w10: v2(2556.22,1675.59) 2609.28,1675.59 2615.91,1668.96 2654.01,1668.96 2662.03,1676.98 2838.37,1676.98 2843.47,1671.87 2845,1671.87 TP237.1@2845,1670 2880,1670 2880.62,1669.38 v1(2890.21,1669.38)
INV_GPIO_20: R779.2 TP618.1 U4.63 U6.A4 | length 1697
  Top Layer w6: U6.A4@2615.28,1577.17 2755,1577.17 2801.95,1577.17 2829.31,1549.81 2832.14,1549.81
  Top Layer w9: 3575.78,1433.41 3576.9,1434.52 3680.38,1434.52 3697.57,1451.71 3831.5,1451.71 3839.79,1460 4040,1460 U4.63@4074.88,1460
  Top Layer w10: 2832.14,1549.81 2921.94,1549.81 3076.82,1394.92 3208.98,1394.92 3220,1383.91 R779.2@3220,1350 3246.71,1350 3270.52,1373.81 v1(3270.51,1374.87) 3270.84,1374.87 3282.58,1386.61 3383.12,1386.61 3411.86,1415.35 3557.73,1415.35 3575.78,1433.41
  Bottom Layer w10: TP618.1@3225,1350 3264.5,1389.5 3269.21,1389.5 3269.71,1390 3269.71,1374.87 v1(3270.51,1374.87)
INV_GPIO_21: R775.2 TP236.1 U4.67 U6.C4 | length 1767.7
  Top Layer w9: 3973.82,1380.06 3975.28,1378.59 3999.42,1378.59 4002.03,1381.2 4040,1381.2 4074.88,1381.2 U4.67@4074.88,1381.26
  Top Layer w10: U6.C4@2536.54,1577.17 v2(2556.22,1596.85) ; v1(2881.44,1494.92) 3098.77,1277.6 3369.74,1277.6 3401.23,1309.08 3523,1309.08 3539.32,1325.39 3539.32,1350 R775.2@3540,1350 3540,1356.36 3552.92,1369.28 3572.85,1369.28 3598.59,1395.02 3696.74,1395.02 3713.94,1412.21 3888.28,1412.21 3920.44,1380.06 3973.82,1380.06
  Bottom Layer w10: v2(2556.22,1596.85) 2643.07,1510 TP236.1@2810,1510 2866.36,1510 v1(2881.44,1494.92)